# Altium PCB DPT2.2.PcbDoc (part 2 of 2)
Units mil, origin at the board's own origin, x right, y up, seen from the top; angles counter-clockwise.
Board outline 3640 x 3840 mil, 4 copper layers (Top Layer, Layer 1, Layer 2, Bottom Layer), stack 58.706 mil thick; 234 components, 56 nets, 481 pads, 759 vias.
Unrouted connection lines stored in the file: 137.
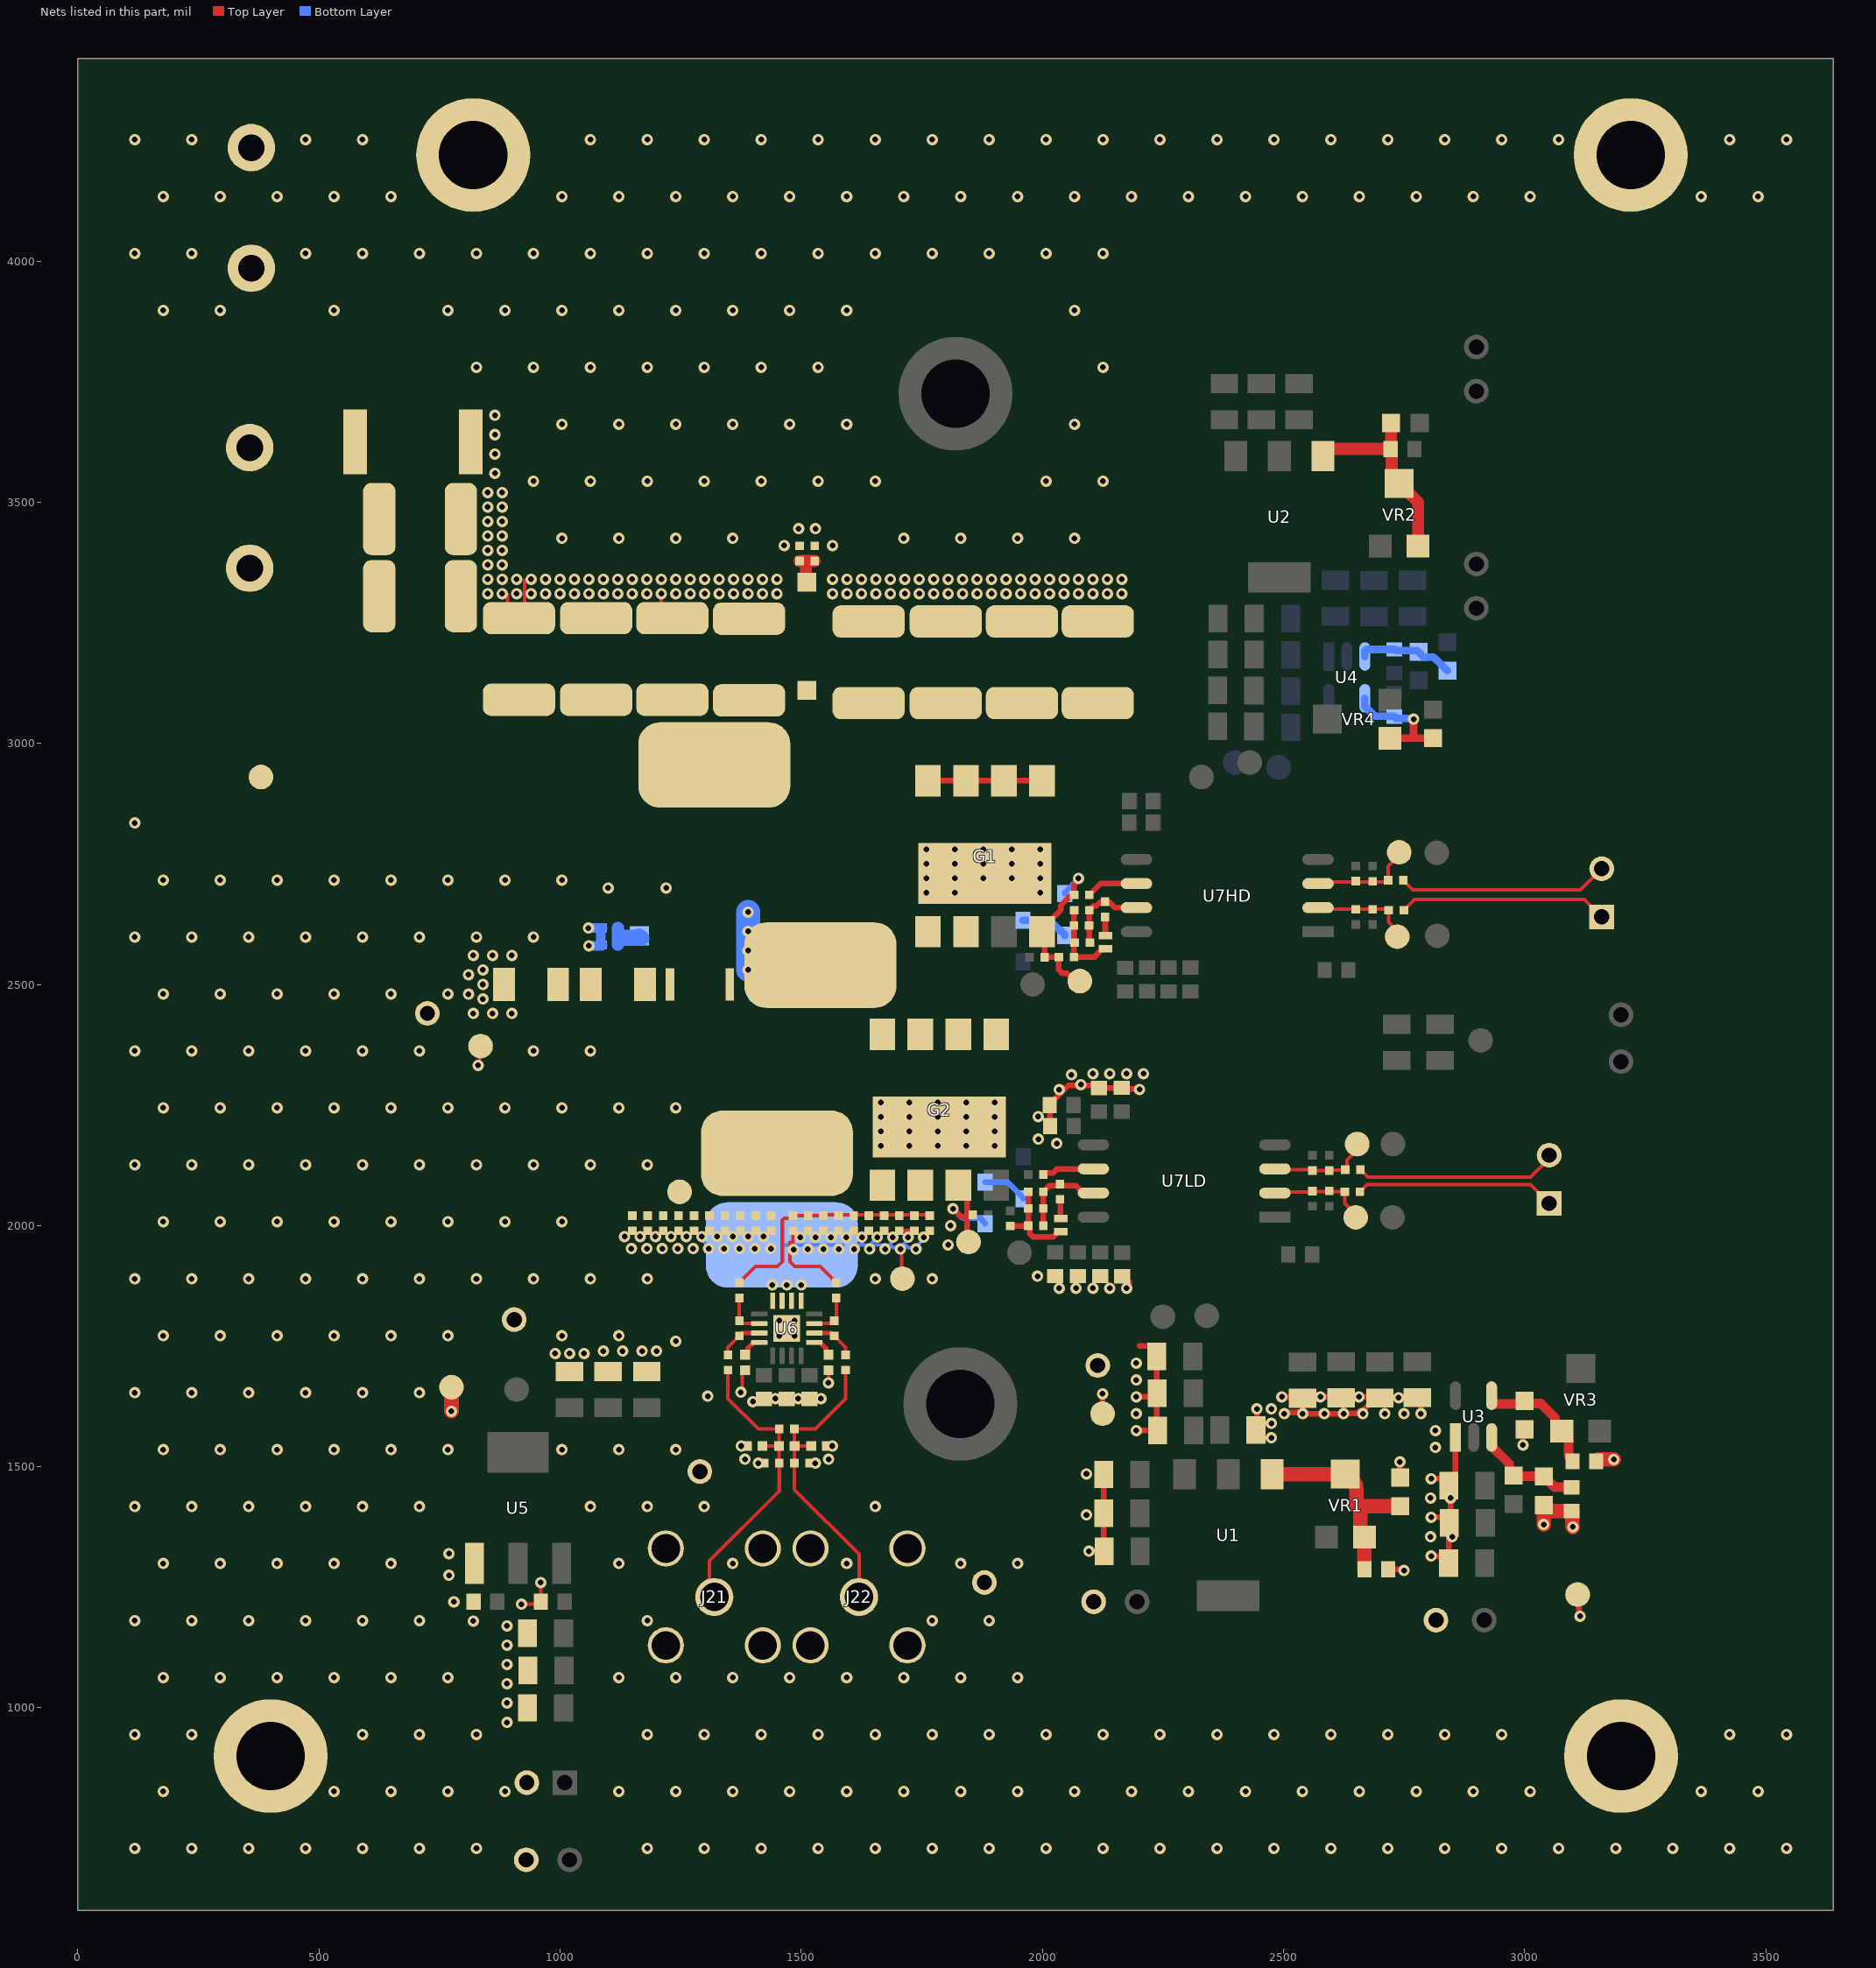
[diagram p4: the nets of this part, all layers, seen from the top]

## Via types
v1: diameter 23.62, hole 11.81, Top Layer to Bottom Layer, tented both sides, 744 vias
v2: diameter 23.62, hole 11.81, Top Layer to Bottom Layer, 15 vias

## Nets (pads, with @x,y where several pads share a name; then routed paths per layer and width w, separated by ;. In a path a pad name is that pad's centre, name@x,y a point inside that pad or via, vN(x,y) a via of type N, cw(c..) or ccw(c..) an arc to the next point about the centre after c; other vN are vias at no path point) (continued)
L_SS: C11.2 C12.2 C13.2 C14.2 C19.1 C21.2 C22.2 C23.2 C24.2 C31.2 C32.2 C33.2 C34.2 C35.1 C36.1 C44.2 C53.1 C63LD.1 C64LD.1 C65LD.1 C66LD.1 C68LD.2 C69LD.2 C70LD.2 C71LD.2 D3LD.1 G2.3 L_SS1.1 L_SS2.1 L_SS3.1 L_SS4.1 L_SS.1 R11.2 R19.1 RSET1.1 RSET3.1 U3.1 | length 2345.6
  Top Layer w11.81: v1(1815,2035) 1833,2017 1843.82,2017 ; G2.3@1825.98,2083.5 1825.98,2077.6 1843.82,2059.76 1843.82,2017 ; L_SS3.1@1847,1966 1843.82,1969.18 1843.82,2017 ; R19.1@1848.53,2022.37 R19.1@1855.99,2022.37 ; C71LD.2@2016.04,2206.22 2015.72,2206.54 2015.72,2251.64 2015.39,2251.97 2040.27,2276.84 2053.94,2290.51 2080.07,2290.51 2112.14,2290.51 C70LD.2@2117.21,2285.45 ; v1(2096.61,1325) C44.2@2128.3,1324.98 2127.61,1325.67 C12.2@2127.61,1484 ; C70LD.2@2117.21,2290.51 2122.21,2285.51 2159.81,2285.51 2162.34,2288.04 C69LD.2@2164.81,2290.51 ; L_SS1.1@2125,1610 v1(2125,1651.3) ; C69LD.2@2164.81,2285.57 2166.52,2283.87 2200.05,2283.87 v1(2201.76,2282.17) ; C65LD.1@2167.55,1894.77 2180.59,1881.73 2180.59,1870.59 v1@2180,1870 ; 2201.61,1750 2224.97,1750 2237.35,1737.62 C13.2@2237.35,1652 ; v1@2206.61,1575 C14.2@2239.21,1575 2237.35,1576.86 C13.2@2237.35,1651.14 ; v1@2206.61,1645 2231.21,1645 C13.2@2237.35,1651.14 ; C13.2@2238.21,1652 C13.2@2237.35,1651.14 ; v1(2445,1620) 2445,1588.21 2446.79,1590 v1(2475,1590) ; v1(2496.61,1645) v1(2576.61,1645) v1(2656.61,1645) C23.2@2700.45,1645 ; v1(2501.61,1610) 2503.87,1612.26 2530.24,1612.26 v1@2531.61,1613.64 ; C34.2@2539.61,1642 2540,1641.61 v1(2540,1610) v1(2625,1610) ; C33.2@2619.61,1643 2625,1637.61 v1(2625,1610) ; v1@2659.28,1615.72 2654.53,1610.97 2625.97,1610.97 v1(2625,1610) ; v1(2665,1610) 2667.26,1612.26 2667.26,1618.7 C23.2@2691.16,1642.6 ; C23.2@2700.02,1642.6 2700.45,1643.04 v1(2738.93,1643.04) C24.2@2777.4,1643.04 2785,1635.44 v1(2785,1610) ; C19.1@2717.21,1287.48 2747.52,1287.48 v1(2750,1285) ; v1(2741.61,1510) 2741.61,1477.93 RSET1.1@2742.02,1477.53 ; v1(2806.61,1315) C21.2@2842.19,1315 ; v1(2806.61,1395) 2832.66,1395 C53.1@2844.08,1383.58 ; v1(2806.61,1475) 2837.59,1475 2843.02,1469.57 C22.2@2843.02,1461 ; C21.2@2842.58,1300.39 2842.58,1315 v1@2842.58,1355 ; C22.2@2843.02,1475 2848.16,1475 2856.79,1483.64 2856.79,1498.64 2856.94,1498.79 U3.1@2856.94,1560.76 ; v1(2846.61,1435) 2846.61,1386.11 C53.1@2844.08,1383.58 ; v1(2850,1355) v1@2842.58,1355 ; v1(2996.61,1545) 2996.61,1574.07 RSET3.1@3000.02,1577.47 ; L_SS2.1@3110,1235 3112.74,1232.26 3112.74,1192.26 v1(3115,1190) ; C36.1@3148.61,1511.25 C36.1@3152.35,1515 ; v1@2842.58,1355 2842.58,1382.07 C53.1@2844.08,1383.58
  Top Layer w30: v1(3040,1380) R11.2@3040,1420.47 3052.32,1408.16 C35.1@3097.72,1408.16 3098.86,1407.02 3098.86,1376.14 v1(3100,1375) ; C36.1@3152.35,1515 v1(3185,1515)
  Bottom Layer w11.81: 1832,2017 1834.13,2017 1835.93,2015.2 1871.77,2015.2 1881.61,2005.35 D3LD.1@1881.61,2003.39
  other v1: 2805,1355 2091.61,1400 2805,1435 2091.61,1485 2815,1540 2475,1560 2195,1575 2815,1575 2195,1610 2585,1610 2710,1610 2750,1610 2475,1620 2195,1645 2195,1680 2195,1715 2035,1870 2070,1870 2105,1870 2140,1870 2175,1870 1990,1895 1805,1960 1810,2000 2080.07,2292.36 2105,2315 2140,2315 2175,2315 2210,2315
  other v2: 2030,2170 1991.88,2179.44 1991.51,2225.79 2035.07,2282.04 2060.48,2312.74
NetC19_2: C19.2 RSET1.2 U1.1 VR1.2 VR1.3 | length 452.7
  Top Layer w30: U1.1@2476.18,1484.55 2628.47,1484.55 2650.7,1462.32 2650.7,1454 2651.61,1453.09 2651.61,1418.47 RSET1.2@2742.02,1418.47 ; 2660,1418.47 2660,1362.47 2668,1354.47 C19.2@2668,1287.48
NetC20_2: C20.2 RSET2.2 U2.1 VR2.2 VR2.3 | length 427.3
  Top Layer w25: U2.1@2582.15,3595.68 2582.15,3599.42 2593.27,3610.54 2721.85,3610.54 C20.2@2722.39,3610 ; RSET2.2@2723.47,3664 2722.93,3663.46 2722.93,3610.54 2724.66,3608.82 2724.66,3554.4 2779.37,3499.68 VR2.2@2779.37,3409.13
NetC35_2: C35.2 R8.2 R11.1 U3.3 | length 228.7
  Top Layer w19.68: U3.3@2931.75,1560.76 2931.75,1542.46 2968.16,1506.05 2968.16,1490.39 R8.2@2977.02,1481.53 2978.01,1480.53 3039,1480.53 R11.1@3040,1479.53 3062.16,1457.37 C35.2@3097.72,1457.37
NetC36_2: C36.2 RSET3.2 U3.4 VR3.1 | length 265.5
  Top Layer w19.68: U3.4@2931.75,1647.41 2931.75,1631.8 2933.13,1630.43 2993.91,1630.43 RSET3.2@3000.02,1636.53 ; RSET3.2@3003.18,1633.36 3005.79,1630.75 3034.03,1630.75 3063.46,1601.32 3063.46,1587.91 VR3.1@3077.24,1574.13 3091.02,1560.35 3091.02,1521.59 3099.39,1513.22 C36.2@3099.39,1511.25
NetC37_2: C37.2 R9.2 R12.1 U4.3 | length 202.2
  Bottom Layer w15.75: U4.3@2668.88,3179.92 2668.88,3191.41 2672.07,3194.61 C37.2@2730,3194.61 2732.54,3192.07 2777.46,3192.07 R12.1@2780,3189.53 2790.83,3178.7 2811.15,3178.7 2814.78,3175.08 2815.39,3175.08 R9.2@2840,3150.47
NetC38_2: C38.2 RSET4.2 U4.4 VR4.1 | length 257.2
  Top Layer w15.75: VR4.1@2720.87,3010.63 2721.18,3010.94 2770,3010.94 ; v1(2770,3050) 2770,3010.94 ; RSET4.2@2810,3010.47 2809.53,3010.94 2770,3010.94
  Bottom Layer w15.75: U4.4@2668.88,3093.27 2668.88,3076.85 2689.65,3056.08 2729.32,3056.08 2733.89,3051.51 2768.49,3051.51 v1(2770,3050)
NetC39_2: C39.2 R15.2
NetC58_2: C58.2 U6.9 | length 44.3
  Top Layer w9.84: U6.9@1527.43,1757.54 1539.24,1757.54 1551.65,1745.13 1551.65,1737.65 C58.2@1556.96,1732.34
NetC59_2: C59.2 C60.1 J21.1 R33.2 R35.1 R36.2 | length 638.8
  Top Layer w7.28: J21.1@1320,1230 1310,1240 1310,1305 1454.65,1449.65 R33.2@1454.6,1507.54 ; R35.1@1348.3,1700.45 1348.3,1641.39 1411.49,1578.21 R36.2@1454.4,1578.21 ; C59.2@1419.56,1542.97 C60.1@1454.21,1542.97 ; R33.2@1454.6,1507.54 R33.2@1454.6,1507.54 ; R36.2@1454.6,1578.4 R36.2@1454.4,1578.21 ; C60.1@1454.21,1542.97 1454.4,1543.17 R36.2@1454.4,1578.21 ; C60.1@1454.21,1542.97 1454.4,1542.77 1454.4,1507.73 R33.2@1454.6,1507.54
NetC60_2: C60.2 C61.1 J22.1 R36.1 R38.1 R39.2 | length 630.3
  Top Layer w7.28: C61.1@1521.13,1542.97 C60.2@1486.49,1542.97 ; R38.1@1592.39,1700.45 1592.39,1641.39 1529.4,1578.4 R36.1@1486.1,1578.4 1486.29,1578.21 1486.29,1543.17 C60.2@1486.49,1542.97 ; J22.1@1620,1230 1620,1318.48 1486.1,1452.38 R39.2@1486.1,1507.54 1486.29,1507.73 1486.29,1542.77 C60.2@1486.49,1542.97
NetC62_2: C62.2 U6.4 | length 44.3
  Top Layer w9.84: C62.2@1383.73,1732.34 1389.05,1737.65 1389.05,1745.13 1401.45,1757.54 U6.4@1413.26,1757.54
NetD1HD_1: D1HD.1 R44HD.2 | length 38.6
  Top Layer w11.81: R44HD.2@2130.4,2639.96 2130.66,2639.71 2130.66,2601.8 D1HD.1@2130.91,2601.54
NetD1HD_2: D1HD.2 FB1HD.1 R45HD.2 R46HD.2 R47HD.2 | length 171.9
  Top Layer w11.81: FB1HD.1@2065.81,2556.8 2109.45,2556.8 2109.45,2559.41 2111.38,2559.41 2111.38,2560.77 2124.66,2574.04 D1HD.2@2130.91,2574.04 ; FB1HD.1@2065.81,2556.8 R47HD.2@2065.84,2589.97 ; R47HD.2@2065.87,2590 2065.91,2590.05 2065.91,2622.14 2065.91,2654.01 R45HD.2@2065.96,2654.05
NetD1LD_1: D1LD.1 R44LD.2 | length 40.3
  Top Layer w11.81: R44LD.2@2036.65,2054.6 2037.47,2053.78 2037.47,2015.82 D1LD.1@2038.29,2015
NetD1LD_2: D1LD.2 FB1LD.1 R45LD.2 R46LD.2 R47LD.2 | length 197
  Top Layer w11.81: FB1LD.1@1933.61,1999.25 1933.77,1999.41 1970.68,1999.41 R46LD.2@1970.83,1999.56 1973.79,1996.61 1973.79,1983.77 1980.7,1976.85 2023.28,1976.85 2030.19,1983.77 2030.19,1985.66 2032.04,1987.5 D1LD.2@2038.29,1987.5 ; R47LD.2@1970.87,2035 R45LD.2@1970.87,2070 ; R46LD.2@1971.17,1999.9 R47LD.2@1971.17,2034.69
NetD2HD_1: D2HD.1 FB1HD.2 G1.4 H_Gate1.1 R7.2 R48HD.2 | length 353.8
  Top Layer w11.81: v1(2075,2720) 2075,2716.8 2066.12,2707.93 R48HD.2@2066.12,2685.54 2063.17,2682.59 2057.29,2682.59 2038.6,2663.9 2038.6,2654.54 1999.25,2615.18 G1.4@1999.25,2609.28 2004.97,2603.55 R7.2@2004.97,2556.22 2005.27,2556.51 2034.02,2556.51 FB1HD.2@2034.31,2556.8 2034.31,2530.23 2041.78,2522.76 2051.33,2522.76 2067.21,2506.88 H_Gate1.1@2077.86,2506.88
  Bottom Layer w11.81: D2HD.1@2046.61,2688.31 2046.61,2690.28 2075,2718.66 v1(2075,2720)
NetD2HD_2: D2HD.2 D3HD.2 | length 100.9
  Bottom Layer w15.75: D3HD.2@1960,2633.31 2015,2633.31 2036.77,2611.54 2038.74,2611.54 2046.61,2603.66 D2HD.2@2046.61,2601.69
NetD2LD_2: D2LD.2 D3LD.2 | length 94.4
  Bottom Layer w11.81: D3LD.2@1881.61,2090 1928.27,2090 1960.61,2057.66 D2LD.2@1960.61,2055.69
NetHSig1_1: HSig1.1 R2.2 R3.1 R4.2 U7HD.2 | length 211
  Top Layer w7.28: U7HD.2@2571.74,2659.18 2574.33,2656.59 2715.66,2656.59 R4.2@2718.25,2654 2718.25,2628.63 2736,2610.88 HSig1.1@2736,2599
NetJ4_1: J4.1 R4.1 | length 434.3
  Top Layer w7.28: R4.1@2749.75,2654 2771.75,2676 3124,2676 J4.1@3160,2640
NetJ4_2: J4.2 R5.1 | length 438
  Top Layer w7.28: R5.1@2748.5,2716 2768.5,2696 3116,2696 J4.2@3160,2740
NetJ10_1: J10.1 R16.1 | length 414.6
  Top Layer w7.28: R16.1@2658.75,2070 2673.75,2085 3012,2085 J10.1@3051,2046
NetJ10_2: J10.2 R17.1 | length 420.9
  Top Layer w7.28: R17.1@2659.75,2116 2675.59,2100.16 3012.16,2100.16 3051,2139 J10.2@3051,2146
NetLSig1_1: LSig1.1 R13.2 R14.1 R16.2 U7LD.2 | length 209.5
  Top Layer w7.28: U7LD.2@2482.44,2067.56 2484.4,2069.53 2558.03,2069.53 R13.2@2560,2071.5 2560.75,2070.75 2626.5,2070.75 R16.2@2627.25,2070 2627.25,2045.89 2650,2023.15 LSig1.1@2650,2017
NetnHSig1_1: nHSig1.1 R5.2 R6.1 R10.2 U7HD.3 | length 215.6
  Top Layer w7.28: U7HD.3@2571.74,2709.18 2574.73,2712.17 2713.17,2712.17 R5.2@2717,2716 2717,2745.36 2740,2768.36 nHSig1.1@2740,2774
NetnLSig1_1: nLSig1.1 R17.2 R18.1 R21.2 U7LD.3 | length 211.2
  Top Layer w7.28: U7LD.3@2482.44,2117.56 2484.09,2115.91 2558.35,2115.91 R21.2@2560,2114.25 R18.1@2595,2114.25 2595.87,2115.13 2627.38,2115.13 R17.2@2628.25,2116 2631.66,2119.41 2631.66,2135.78 2653,2157.12 nLSig1.1@2653,2169
NetR15_1: R15.1 R20.2
NetR32_1: R32.1 R35.2 U6.3 | length 92.9
  Top Layer w7.28: R35.2@1348.3,1731.95 1348.3,1747.69 R32.1@1371.92,1771.32
  Top Layer w9.84: R32.1@1371.92,1771.32 1377.83,1777.22 U6.3@1413.26,1777.22
NetR32_2: R32.2 R34.1 U6.2 | length 91
  Top Layer w7.28: R34.1@1371.92,1850.06 R32.2@1371.92,1802.81 1377.83,1796.91 U6.2@1413.26,1796.91
NetR37_1: R37.1 R40.2 U6.11 | length 92.7
  Top Layer w7.28: U6.11@1527.43,1796.91 1562.87,1796.91 R40.2@1568.77,1802.81 1572.71,1806.75 R37.1@1572.71,1850.06
NetR38_2: R38.2 R40.1 U6.10 | length 92.9
  Top Layer w7.28: R40.1@1568.77,1771.32 1592.39,1747.69 R38.2@1592.39,1731.95
  Top Layer w9.84: U6.10@1527.43,1777.22 1562.87,1777.22 R40.1@1568.77,1771.32
NetR41D_2: R41D.2 R42D.2 R43D.2 | length 119.6
  Bottom Layer w25: R43D.2@1119.61,2582 1119.9,2582.29 1119.9,2600.7 ; R42D.2@1120.19,2616.95 1120.19,2600.7 R41D.2@1164.48,2600.7
  Bottom Layer w31.5: 1135,2595.94 R41D.2@1169.7,2595.94 ; R41D.2@1164.48,2600.7 R41D.2@1168.42,2596.76
NetR41V_2: R41V.2 R42V.2 R43V.2 | length 75.4
  Top Layer w25: R42V.2@1496.76,3378 1510,3378 ; R41V.2@1510,3334.12 1510,3378 ; R43V.2@1528.26,3378 1510,3378
NetR44HD_1: R44HD.1 R45HD.1 R46HD.1 R47HD.1 U7HD.7 | length 173
  Top Layer w11.81: R47HD.1@2097.36,2590 2097.41,2590.05 2097.41,2654.01 R45HD.1@2097.45,2654.05 2106.3,2662.9 2112.19,2662.9 2119.28,2670 2140,2670 2150.82,2659.18 U7HD.7@2195.31,2659.18
NetR44LD_1: R44LD.1 R45LD.1 R46LD.1 R47LD.1 U7LD.7 | length 188.5
  Top Layer w11.81: R46LD.1@2002.33,1999.56 2002.35,2034.98 R45LD.1@2002.36,2070 2015.51,2083.15 2033.7,2083.15 R44LD.1@2036.65,2086.1 2039.54,2083.21 2069.24,2083.21 2084.89,2067.56 U7LD.7@2106.01,2067.56
NetR48HD_1: R48HD.1 U7HD.6 | length 107.5
  Top Layer w11.81: R48HD.1@2097.62,2685.54 2121.26,2709.18 U7HD.6@2195.31,2709.18
NetR48LD_1: R48LD.1 U7LD.6 | length 108.7
  Top Layer w11.81: R48LD.1@2002.17,2105.76 2005.12,2108.72 2022.07,2108.72 2030.91,2117.56 U7LD.6@2106.01,2117.56
PGND: C1.2 C2.2 C3.2 C4.2 C5.1 C6.2 C7.2 C8.1 C46.2 C47.2 C48.2 C49.1 C50.1 C51.1 C52.1 C55.1 C56.1 C57.1 C58.1 C59.1 C61.2 C62.1 C72.2 C73.2 C74.2 C75.2 J3.1 J3.2 J20.1 J21.2 J21.3 J21.4 J21.5 J22.2 J22.3 J22.4 J22.5 MH1.1 MH2.1 MH3.1 MH4.1 PGND1.1 PGND2.1 PGND3.1 PGND4.1 PGND5.1 PGND6.1 PGND7.1 PGND.1 R1.2 R20.1 R22.1 R23.1 R24.1 R25.1 R26.1 R27.1 R28.1 R29.1 R30.1 R31.1 R33.1 R37.2 R39.1 R42D.1 R42V.1 R43D.1 R43V.1 R49.1 R50.1 R51.1 R52.1 R53.1 R54.1 R55.1 R56.1 R57.1 R58.1 U5.1 U6.13 U6.14 U6.15 U6.16 U6.17 U6.18 U6.19 U6.20 U6.21 | length 1346.9
  Top Layer w7.28: v1(830.36,2332.02) 832.86,2334.52 832.86,2369.52 PGND2.1@835.36,2372.02 ; v1@891.61,3308 891.61,3283.03 C72.2@915,3259.65 926.61,3271.26 926.61,3338 ; v1(920,1215) 955.39,1215 C50.1@960.39,1220 960,1220.39 v1(960,1260) ; v1@1210,3315 1210,3282.65 C6.2@1233,3259.65 ; v1(1375,1654.57) 1378.13,1657.69 1378.13,1694.45 C62.1@1383.73,1700.06 ; 1476.76,1965 1476.76,1925.42 1487.18,1915 1539.26,1915 R37.2@1572.71,1881.55 ; R22.1@1483.03,1989.25 1483.68,1988.6 1483.68,1955.77 1478.11,1950.2 v1(1484.33,1950.2) ; v1(1556.69,1674.15) 1556.83,1674.29 1556.83,1699.92 C58.1@1556.96,1700.06 ; v1(1706.12,1951.35) 1708.06,1949.41 1708.06,1891.94 PGND1.1@1710,1890 ; R30.1@1707.79,1988.89 1708.72,1989.82 R23.1@1730.75,1989.82
  Top Layer w30: v1(775,1615) PGND3.1@775,1665
  Bottom Layer w7.28: v1(1308.18,1952.35) 1308.18,1956.77 v1@1297.13,1967.82 ; J20.1@1460,1960 J20.1@1514.08,1960 ; v1(1514.08,1951.35) J20.1@1514.08,1960 ; v1(1546.08,1951.35) J20.1@1546.08,1960 ; v1(1610.1,1951.35) 1610.1,1960 1626,1960 ; v1(1626,1976) 1626,1960 ; v1(1642.11,1951.35) 1642.11,1960 1626,1960 ; v1(1658,1976) 1658,1975.85 1642.15,1960 v1@1674.12,1960 ; v1(1690,1976) 1686.87,1972.87 1686.87,1962.46 1684.42,1960 ; v1@1703,1954.47 1689.94,1954.47 1684.42,1960 ; v1(1706.12,1951.35) 1706.12,1955.74 v1@1710.39,1960 ; v1(1754,1976) 1754,1971.61 1738.13,1955.74 v1(1738.13,1951.35) 1735.01,1954.47 1721.95,1954.47 1716.42,1960 v1@1710.39,1960 ; v1@1297.13,1967.82 1297.13,1973.87 v1(1294,1977) 1294,1970.95 v1@1297.13,1967.82 ; J20.1@1514.08,1960 1530,1960 J20.1@1546.08,1960 ; J20.1@1546.08,1960 J20.1@1578.09,1960 ; J20.1@1578.09,1960 v1(1578.09,1951.35) 1586.75,1960 J20.1@1578.09,1960 ; v1(1674.12,1951.35) v1@1674.12,1960 ; v1(1674.12,1951.35) v1@1674.12,1960 ; v1(1674.12,1951.35) v1@1674.12,1960 ; v1@1674.12,1960 1684.42,1960 ; v1@1710.39,1960 v1@1722,1971.61 ; v1@1722,1971.61 v1(1722,1976) ; v1@1722,1971.61 v1(1722,1976) ; v1@1722,1971.61 v1(1722,1976)
  Bottom Layer w20: v1(1058.86,2617) R42D.1@1088.67,2616.97 ; v1(1060,2580) R43D.1@1080,2580 ; R43D.1@1088.12,2582 1086.12,2580 R43D.1@1080,2580 ; R42D.1@1088.69,2616.95 1084.27,2612.52 1084.27,2584.27 R43D.1@1080,2580
  other v1: 118.11,708.66 236.22,708.66 354.33,708.66 472.44,708.66 590.55,708.66 708.66,708.66 826.77,708.66 1181.1,708.66 1299.21,708.66 1417.32,708.66 1535.43,708.66 1653.54,708.66 1771.65,708.66 1889.76,708.66 2007.87,708.66 2125.98,708.66 2244.09,708.66 2362.2,708.66 2480.31,708.66 2598.42,708.66 2716.53,708.66 2834.64,708.66 2952.76,708.66 3070.87,708.66 3188.98,708.66 3307.09,708.66 3425.2,708.66 3543.31,708.66 177.17,826.77 531.5,826.77 649.61,826.77 767.72,826.77 885.83,826.77 1122.05,826.77 1240.16,826.77 1358.27,826.77 1476.38,826.77 1594.49,826.77 1712.6,826.77 1830.71,826.77 1948.82,826.77 2066.93,826.77 2185.04,826.77 2303.15,826.77 2421.26,826.77 2539.37,826.77 2657.48,826.77 2775.59,826.77 2893.7,826.77 3011.81,826.77 3366.14,826.77 3484.25,826.77 118.11,944.88 236.22,944.88 590.55,944.88 708.66,944.88 826.77,944.88 1181.1,944.88 1299.21,944.88 1417.32,944.88 1535.43,944.88 1653.54,944.88 1771.65,944.88 1889.76,944.88 2007.87,944.88 2125.98,944.88 2244.09,944.88 2362.2,944.88 2480.31,944.88 2598.42,944.88 2716.53,944.88 2834.64,944.88 2952.76,944.88 3425.2,944.88 3543.31,944.88 890,970 890,1010 890,1050 177.17,1062.99 295.28,1062.99 413.39,1062.99 531.5,1062.99 649.61,1062.99 767.72,1062.99 1122.05,1062.99 1240.16,1062.99 1358.27,1062.99 1476.38,1062.99 1594.49,1062.99 1712.6,1062.99 1830.71,1062.99 1948.82,1062.99 890,1090 890,1130 890,1170 820,1180 118.11,1181.1 236.22,1181.1 354.33,1181.1 472.44,1181.1 590.55,1181.1 708.66,1181.1 1181.1,1181.1 1771.65,1181.1 1889.76,1181.1 780,1220 770,1275 177.17,1299.21 295.28,1299.21 413.39,1299.21 531.5,1299.21 649.61,1299.21 1122.05,1299.21 1358.27,1299.21 1594.49,1299.21 1830.71,1299.21 1948.82,1299.21 770,1320 118.11,1417.32 236.22,1417.32 354.33,1417.32 472.44,1417.32 590.55,1417.32 708.66,1417.32 1062.99,1417.32 1181.1,1417.32 1299.21,1417.32 1653.54,1417.32 1411.29,1507.54 1529.4,1507.54 1383.73,1515.41 1556.96,1515.41 177.17,1535.43 295.28,1535.43 413.39,1535.43 531.5,1535.43 649.61,1535.43 767.72,1535.43 1003.94,1535.43 1122.05,1535.43 1240.16,1535.43 1375.86,1542.97 1564.84,1542.97 1400,1635 1446.73,1641.39 1493.97,1641.39 1541.21,1641.39 1306.43,1646.32 118.11,1653.54 236.22,1653.54 354.33,1653.54 472.44,1653.54 590.55,1653.54 708.66,1653.54 990,1735 1020,1735 1050,1735 1240,1760 177.17,1771.65 295.28,1771.65 413.39,1771.65 531.5,1771.65 649.61,1771.65 767.72,1771.65 1003.94,1771.65 1122.05,1771.65 1440.35,1877.06 1470.35,1877.06 1500.35,1877.06 118.11,1889.76 236.22,1889.76 354.33,1889.76 472.44,1889.76 590.55,1889.76 708.66,1889.76 826.77,1889.76 944.88,1889.76 1062.99,1889.76 1181.1,1889.76 1653.54,1889.76 1771.65,1889.76 1148.14,1952.35 1180.15,1952.35 1212.16,1952.35 1244.16,1952.35 1276.17,1952.35 1340.19,1952.35 1372.19,1952.35 1404.2,1952.35 1437.3,1952.29 1498,1976 1530,1976 1562,1976 1594,1976 1134,1977 1166,1977 1198,1977 1230,1977 1262,1977 1326,1977 1358,1977 1390,1977 1422,1977 177.17,2007.87 295.28,2007.87 413.39,2007.87 531.5,2007.87 649.61,2007.87 767.72,2007.87 885.83,2007.87 1003.94,2007.87 118.11,2125.98 236.22,2125.98 354.33,2125.98 472.44,2125.98 590.55,2125.98 708.66,2125.98 826.77,2125.98 944.88,2125.98 1062.99,2125.98 1181.1,2125.98 177.17,2244.09 295.28,2244.09 413.39,2244.09 531.5,2244.09 649.61,2244.09 767.72,2244.09 885.83,2244.09 1003.94,2244.09 1122.05,2244.09 1240.16,2244.09 118.11,2362.2 236.22,2362.2 354.33,2362.2 472.44,2362.2 590.55,2362.2 708.66,2362.2 944.88,2362.2 1062.99,2362.2 820,2440 860,2440 900,2440 840,2470 177.17,2480.31 295.28,2480.31 413.39,2480.31 531.5,2480.31 649.61,2480.31 767.72,2480.31 810,2480 840,2500 810,2520 840,2530 820,2560 860,2560 900,2560 118.11,2598.42 236.22,2598.42 354.33,2598.42 472.44,2598.42 590.55,2598.42 708.66,2598.42 826.77,2598.42 944.88,2598.42 1100,2700 1220,2700 177.17,2716.53 295.28,2716.53 413.39,2716.53 531.5,2716.53 649.61,2716.53 767.72,2716.53 885.83,2716.53 1003.94,2716.53 118.11,2834.64 850,3310 880,3310 910,3310 940,3310 970,3310 1000,3310 1030,3310 1060,3310 1090,3310 1120,3310 1150,3310 1180,3310 1210,3310 1240,3310 1270,3310 1300,3310 1330,3310 1360,3310 1390,3310 1420,3310 1450,3310 1565,3310 1595,3310 1625,3310 1655,3310 1685,3310 1715,3310 1745,3310 1775,3310 1805,3310 1835,3310 1865,3310 1895,3310 1925,3310 1955,3310 1985,3310 2015,3310 2045,3310 2075,3310 2105,3310 2135,3310 2165,3310 850,3340 880,3340 910,3340 940,3340 970,3340 1000,3340 1030,3340 1060,3340 1090,3340 1120,3340 1150,3340 1180,3340 1210,3340 1240,3340 1270,3340 1300,3340 1330,3340 1360,3340 1390,3340 1420,3340 1450,3340 1565,3340 1595,3340 1625,3340 1655,3340 1685,3340 1715,3340 1745,3340 1775,3340 1805,3340 1835,3340 1865,3340 1895,3340 1925,3340 1955,3340 1985,3340 2015,3340 2045,3340 2075,3340 2105,3340 2135,3340 2165,3340 850,3370 880,3370 850,3400 880,3400 1465,3410 1565,3410 1003.94,3425.2 1122.05,3425.2 1240.16,3425.2 1358.27,3425.2 1712.6,3425.2 1830.71,3425.2 1948.82,3425.2 2066.93,3425.2 850,3430 880,3430 1495,3445 1530,3445 850,3460 880,3460 850,3490 880,3490 850,3520 880,3520 944.88,3543.31 1062.99,3543.31 1181.1,3543.31 1299.21,3543.31 1417.32,3543.31 1535.43,3543.31 1653.54,3543.31 2007.87,3543.31 2125.98,3543.31 865,3560 865,3600 865,3640 1003.94,3661.42 1122.05,3661.42 1240.16,3661.42 1358.27,3661.42 1476.38,3661.42 1594.49,3661.42 2066.93,3661.42 865,3680 826.77,3779.53 944.88,3779.53 1062.99,3779.53 1181.1,3779.53 1299.21,3779.53 1417.32,3779.53 1535.43,3779.53 2125.98,3779.53 177.17,3897.64 295.28,3897.64 531.5,3897.64 767.72,3897.64 885.83,3897.64 1003.94,3897.64 1122.05,3897.64 1240.16,3897.64 1358.27,3897.64 1476.38,3897.64 1594.49,3897.64 2066.93,3897.64 118.11,4015.75 236.22,4015.75 472.44,4015.75 590.55,4015.75 708.66,4015.75 826.77,4015.75 944.88,4015.75 1062.99,4015.75 1181.1,4015.75 1299.21,4015.75 1417.32,4015.75 1535.43,4015.75 1653.54,4015.75 1771.65,4015.75 1889.76,4015.75 2007.87,4015.75 2125.98,4015.75 177.17,4133.86 295.28,4133.86 413.39,4133.86 531.5,4133.86 649.61,4133.86 1003.94,4133.86 1122.05,4133.86 1240.16,4133.86 1358.27,4133.86 1476.38,4133.86 1594.49,4133.86 1712.6,4133.86 1830.71,4133.86 1948.82,4133.86 2066.93,4133.86 2185.04,4133.86 2303.15,4133.86 2421.26,4133.86 2539.37,4133.86 2657.48,4133.86 2775.59,4133.86 2893.7,4133.86 3011.81,4133.86 3366.14,4133.86 3484.25,4133.86 118.11,4251.97 236.22,4251.97 472.44,4251.97 590.55,4251.97 1062.99,4251.97 1181.1,4251.97 1299.21,4251.97 1417.32,4251.97 1535.43,4251.97 1653.54,4251.97 1771.65,4251.97 1889.76,4251.97 2007.87,4251.97 2125.98,4251.97 2244.09,4251.97 2362.2,4251.97 2480.31,4251.97 2598.42,4251.97 2716.53,4251.97 2834.64,4251.97 2952.76,4251.97 3070.87,4251.97 3425.2,4251.97 3543.31,4251.97
  other v2: 1090,1740 1130,1740 1170,1740 1200,1740
Source: G2.1 G2.2 G2.9 J14.1 R22.2 R23.2 R24.2 R25.2 R26.2 R27.2 R28.2 R29.2 R30.2 R31.2 R34.2 R49.2 R50.2 R51.2 R52.2 R53.2 R54.2 R55.2 R56.2 R57.2 R58.2 Source1.1 | length 510.4
  Top Layer w7.28: R34.2@1371.92,1881.55 1405.37,1915 1451,1915 1461,1925 1461,2011.27 1465.27,2015.53 1477.82,2015.53 R22.2@1483.03,2020.75 R24.2@1514.53,2020.75 R25.2@1546.02,2020.75 ; R25.2@1546.02,2022.25 1577.52,2022.25 1609.02,2022.25 1640.51,2022.25 1672.01,2022.25 1703.5,2022.25 1735,2022.25 R31.2@1768.46,2022.25
  Top Layer w9.84: R31.2@1766.5,2020.75 1770.43,2016.81 R31.2@1770.43,2016.67
  other v1: 1665,2165 1724.06,2165 1783.11,2165 1842.17,2165 1901.22,2165 1665,2195 1724.06,2195 1783.11,2195 1842.17,2195 1901.22,2195 1665,2225 1724.06,2225 1783.11,2225 1842.17,2225 1901.22,2225 1665,2255 1724.06,2255 1783.11,2255 1842.17,2255 1901.22,2255
SW_NODE: C39.1 G1.1 G1.2 G1.9 G2.5 G2.6 G2.7 G2.8 J6.1 R41D.1 | length 120
  Bottom Layer w50: v2(1390,2530) v2(1390,2610) v1(1390,2650)
  other v1: 1390,2570 1760,2690 1819.06,2690 1996.22,2690 1760,2720 1819.06,2720 1878.11,2720 1937.17,2720 1996.22,2720 1760,2750 1819.06,2750 1878.11,2750 1937.17,2750 1996.22,2750 1760,2780 1819.06,2780 1878.11,2780 1937.17,2780 1996.22,2780
VBUS: C1.1 C2.1 C3.1 C4.1 C6.1 C7.1 C72.1 C73.1 C74.1 C75.1 G1.5 G1.6 G1.7 G1.8 J1.1 J1.2 J2.1 R1.1 R41V.1 Vdd1.1 | length 236.2
  Top Layer w11.81: G1.8@1763.03,2922.27 G1.7@1841.77,2922.27 G1.6@1920.51,2922.27 G1.5@1999.25,2922.27
pads on no net: MH7.1 MH8.1 U6.1

## Polygon pours and split planes (outlines as drawn)
PGND on Top Layer "Top Layer-PGND" (solid, pour order 262): 756.61,3223 2190,3223 2190,3358 906.61,3358 906.61,3725 756.61,3725 756.61,3358
PGND on Top Layer "PGND_L01_P224" (solid, pour order 224): 995,1670 995,1710 970,1710 965,1715 965,1750 970,1755 1215,1755 1230,1740 1230,1670
+5 on Top Layer "+5_L01_P260" (solid, pour order 260): 960,1650 1220,1650 1230,1640 1230,1580 1220,1570 950,1570
GND_SIG on Top Layer "GND_SIG_L01_P257" (solid, pour order 257): 2520,2800 2520,2280 2510,2270 2470,2270 2440,2240 2440,1970 2500,1910 3250,1910 3310,1970 3310,2770 3250,2830 2550,2830
H_SS on Top Layer "H_SS_L01_P255" (solid, pour order 255): 2000,2500 2140,2500 2160,2480 2160,2445.62 2000,2445.62
+5 on Top Layer "NONET_L-01_P-001" (solid, pour order 58): 1534.32,1674.86 1406.37,1674.86 1406.37,1704.39 1435.7,1733.72 1435.7,1745.63 1504.99,1745.63 1504.99,1733.72 1534.32,1704.39
PGND on Top Layer "NONET_L-01_P-001" (solid, pour order 64): 1776.34,1956.34 1765,1945 1473.19,1945 1473.19,1999.09 1776.34,1999.09
PGND on Top Layer "NONET_L-01_P-001" (solid, pour order 66): 1541.21,1625.65 1399.48,1625.65 1391.61,1633.52 1391.61,1649.27 1397.51,1655.17 1543.18,1655.17 1549.09,1649.27 1549.09,1633.52
PGND on Top Layer "NONET_L-01_P-001" (solid, pour order 118): 1549.09,1554.78 1545.15,1550.84 1545.15,1531.16 1533.34,1519.35 1521.53,1519.35 1517.59,1515.41 1517.59,1499.66 1521.53,1495.73 1556.96,1495.72 1576.65,1515.41 1576.65,1550.84 1572.71,1554.78
PGND on Top Layer "NONET_L-01_P-001" (solid, pour order 119): 1391.61,1554.78 1395.54,1550.84 1395.54,1531.16 1407.36,1519.35 1419.17,1519.35 1423.1,1515.41 1423.1,1499.66 1419.17,1495.73 1383.73,1495.72 1364.05,1515.41 1364.05,1550.84 1367.99,1554.78
PGND on Top Layer "PGND_L01_P129" (solid, pour order 129): 1419.41,1901.06 1419.41,1841.06 1434.41,1826.06 1509.41,1826.06 1524.41,1841.06 1524.41,1901.06
L_SS on Top Layer "L_SS_L01_P131" (solid, pour order 131): 2048,2322.09 2043.75,2322.09 1980.54,2258.89 1980.54,2171.05 1985.02,2166.57 2039.75,2166.57 2039.75,2250.85 2061.24,2272.39 2230,2272.39 2230,2315.97 2223.57,2322.39 2048,2322.39
L_-V on Top Layer "L_-V_L01_P132" (solid, pour order 132): 2048,2252.39 2248,2252.39 2248,2152.39 2078,2152.39 2048,2182.39
PGND on Top Layer "PGND_L01_P136" (solid, pour order 136): 920,2580 920,2420 800,2420 790,2430 790,2570 800,2580
NetC39_2 on Top Layer "NETC39_2_L01_P137" (solid, pour order 137): 1240,2540 1240,2460 1150,2460 1150,2540
NetR15_1 on Top Layer "NETR15_1_L01_P138" (solid, pour order 138): 970,2540 1090,2540 1090,2460 970,2460
L_-V on Top Layer "L_-V_L01_P151" (solid, pour order 151): 2836.61,1695 2836.61,1615 2841.61,1610 2896.61,1610 2901.61,1615 2901.61,1695
L_-VIN on Top Layer "L_-VIN_L01_P152" (solid, pour order 152): 2881.61,1590 2906.61,1590 2906.61,1530 2921.61,1515 2941.61,1515 2941.61,1455 2951.61,1445 3006.61,1445 3006.61,1390 2966.61,1350 2966.61,1145 2876.61,1145 2876.61,1585
L_SS on Top Layer "L_SS_L01_P154" (solid, pour order 154): 2076.61,1525 2076.61,1290 2151.61,1290 2151.61,1525
H_SS on Top Layer "H_SS_L01_P168" (solid, pour order 168): 2122.49,2505.58 2122.49,2470.58 2147.49,2445.58 2322.49,2445.58 2332.49,2455.58 2332.49,2505.58
GND_SIG on Top Layer "GND_SIG_L01_P171" (solid, pour order 171): 2855,2400 2855,2475 2700,2475 2700,2400
+5_SIG on Top Layer "+5_SIG_L01_P172" (solid, pour order 172): 2705,2365 2855,2365 2855,2285 2705,2285
GND_SIG on Top Layer "GND_SIG_L01_P173" (solid, pour order 173): 2446.61,2220 2446.61,2155 2556.61,2155 2556.61,2190 2526.61,2220
GND_SIG on Top Layer "GND_SIG_L01_P175" (solid, pour order 175): 2536.61,2805 2536.61,2740 2616.61,2740 2616.61,2805
L_SS on Top Layer "L_SS_L01_P179" (solid, pour order 179): 2811.61,1665 2811.61,1590 2486.61,1590 2486.61,1665 2491.61,1665 2486.61,1665 2491.61,1665
L_SS on Top Layer "L_SS_L01_P180" (solid, pour order 180): 2791.61,1500 2791.61,1260 2866.61,1260 2866.61,1500
VBUS on Top Layer "VBUS_L01_P188" (solid, pour order 188): 2020,2948.7 2195,3047.6 2195,3128 2040,3128 747,3128 665,3210 665,3730 98,3730 98,3020 288,2830 1487,2830 1545,2888 2020,2888
SW_NODE on Top Layer "SW_NODE_L01_P190" (solid, pour order 190): 1879,2646 1879,2541 1950,2470 1950,2390 1930,2370 1660,2370 1580,2450 1370,2450 1370,2655 1380,2665 1685,2665 1720,2700 1720,2790 2020,2790 2020,2670 1890,2670 1880,2660
SW_NODE on Top Layer "SW_NODE_L01_P191" (solid, pour order 191): 1370,2550 1360,2540 1340,2540 1340,2460 1380,2460 1390,2470 1390,2550
Source on Top Layer "SOURCE_L01_P194" (solid, pour order 194): 1275,2190 1120,2035 1120,2010 1465,2010 1780,2010 1785,2015 1785,2130 1795,2140 1925,2140 1925,2275 1635,2275 1605,2245 1295,2245 1275,2225
+5 on Top Layer "+5_L01_P198" (solid, pour order 198): 980,1390 935,1345 935,1255 890,1255 890,1345 840,1395 840,1660 870,1690 950,1690 980,1660
H_+V on Top Layer "H_+V_L01_P201" (solid, pour order 201): 2460,3630 2525,3630 2525,3530 2600,3455 2725,3455 2725,3385 2560,3385 2560,3310 2390,3310 2390,3000 2385,2995 2340,2995 2335,3000 2335,3450 2375,3450 2460,3535
H_+V on Top Layer "H_+V_L01_P206" (solid, pour order 206): 2380,3070 2380,2900 2350,2870 2350,2520 2150,2520 2150,2620 2230,2620 2290,2680 2290,2950 2340,3000 2340,3070
H_-V on Top Layer "H_-V_L01_P212" (solid, pour order 212): 2750,3060 2665,2975 2560,2975 2560,3130 2750,3130
H_SS on Top Layer "H_SS_L01_P213" (solid, pour order 213): 2760,3050 2760,3130 2840,3130 2880,3090 2880,3050
H_SS on Top Layer "H_SS_L01_P215" (solid, pour order 215): 2570,3810 2570,3720 2320,3720 2320,3780 2350,3810
H_+VIN on Top Layer "H_+VIN_L01_P216" (solid, pour order 216): 2430,3560 2430,3630 2450,3650 2570,3650 2570,3700 2560,3690 2340,3690 2340,3650 2360,3630 2360,3560
H_SS on Top Layer "H_SS_L01_P218" (solid, pour order 218): 2200,2790 2190,2780 2157.45,2780 2157.45,2887.45 2170,2900 2200,2900
H_-V on Top Layer "H_-V_L01_P219" (solid, pour order 219): 2210,2920 2210,2780 2200,2770 2150,2770 2150,2740 2270,2740 2280,2750 2280,2920
H_+VIN on Top Layer "H_+VIN_L01_P222" (solid, pour order 222): 2940,3690 2940,3770 2640,3770 2560,3690 2560,3650 2650,3650 2690,3690 2700,3690
PGND on Top Layer "PGND_L01_P223" (solid, pour order 223): 1120,1960 1135,1945 1455,1945 1455,2000 1120,2000
H_SS on Top Layer "H_SS_L01_P227" (solid, pour order 227): 2415,3290 2465,3290 2465,2955 2440,2930 2395,2930 2395,2980 2415,3000
H_SS on Top Layer "H_SS_L01_P229" (solid, pour order 229): 1890,2655 1890,2540 1985,2445 2010,2445 2010,2655
L_+VIN on Top Layer "L_+VIN_L01_P231" (solid, pour order 231): 2325,1450 2255,1450 2235,1430 2235,1180 2155,1180 2155,1260 2175,1280 2175,1525 2325,1525
L_SS on Top Layer "L_SS_L01_P232" (solid, pour order 232): 2180,1915 2190,1905 2190,1860 2185,1855 2000,1855 1980,1875 1980,1915 2010,1915
PGND on Top Layer "PGND_L01_P233" (solid, pour order 233): 755,1360 755,1205 800,1160 840,1160 840,1360
+VIN on Top Layer "+VIN_L01_P234" (solid, pour order 234): 1045,1360 1070,1335 1070,640 1060,630 980,630 970,640 970,1360
PGND on Top Layer "PGND_L01_P236" (solid, pour order 236): 945,1275 975,1275 975,1200 955,1180 955,955 940,940 885,940 870,955 870,1200
L_SS on Top Layer "L_SS_L01_P237" (solid, pour order 237): 2195,1760 2180,1745 2180,1560 2200,1540 2265,1540 2265,1760
L_SS on Top Layer "L_SS_L01_P238" (solid, pour order 238): 2425,1635 2425,1550 2495,1550 2545,1600 2545,1635 2525,1635 2495,1665 2470,1665
L_SS on Top Layer "L_SS_L01_P239" (solid, pour order 239): 2870,1590 2870,1495 2795,1495 2790,1500 2790,1590
PGND on Top Layer "PGND_L01_P240" (solid, pour order 240): 1580,3400 1580,3440 1560,3460 1470,3460 1450,3440 1450,3400
+5_SIG on Top Layer "+5_SIG_L01_P241" (solid, pour order 241): 2530,2625 2530,2525 2570,2485 2610,2485 2610,2625
GND_SIG on Top Layer "GND_SIG_L01_P242" (solid, pour order 242): 2620,2635 2620,2510 2665,2510 2665,2635
+5_SIG on Top Layer "+5_SIG_L01_P244" (solid, pour order 244): 2450,2030 2450,1965 2495,1920 2525,1920 2525,2030
L_-V on Top Layer "L_-V_L01_P249" (solid, pour order 249): 2080,2160 2240,2160 2280,2120 2280,1960 2480,1760 3190,1760 3220,1730 3220,1550 3130,1550 3130,1600 3050,1680 2450,1680 2320,1810 2320,1850 2170,2000 2170,2130 2150,2150 2080,2150
L_SS on Top Layer "L_SS_L01_P250" (solid, pour order 250): 1860,2000 1940,1920 2020,1920 2020,1820 2000,1820 1989.76,1820 1840,1920 1791.41,1950.78 1791.41,2120 1860,2120
L_+V on Top Layer "L_+V_L01_P251" (solid, pour order 251): 2075,2030 2060,2015 2060,1975 2015,1975 2005,1965 2005,1930 2180,1930 2200,1910 2200,1790 2220,1770 2275,1770 2280,1765 2280,1540 2325,1540 2340,1525 2340,1305 2275,1240 2275,1145 2630,1145 2630,1390 2575,1445 2420,1445 2420,1515 2400,1535 2400,1595 2405,1600 2405,1710 2265,1850 2265,1905 2140,2030
GND_SIG on Layer 1 "GND_SIG_L02_P259" (solid, pour order 259): 2520,2800 2520,2280 2510,2270 2470,2270 2440,2240 2440,1970 2500,1910 3250,1910 3310,1970 3310,2770 3250,2830 2550,2830
H_SS on Layer 1 "H_SS_L02_P256" (solid, pour order 256): 1890,2659.68 1890,2539.68 1984.68,2445 2325.32,2445 2350,2469.68 2350,2769.68 2540,2959.68 2840,2959.68 3010,3129.68 3010,3819.68 2950,3879.68 2390,3879.68 2310,3799.68 2310,3069.68 2190,2949.68 2130,2889.68 2130,2749.68 2020,2749.68 2020,2659.68
L_SS on Layer 1 "L_SS_L02_P184" (solid, pour order 184): 1790,2120 1880,2120 1980,2220 1980,2260 2050,2330 2260,2330 2290,2300 2290,1960 2480,1770 3190,1770 3230,1730 3230,1140 3200,1110 2080,1110 2030,1160 2030,1840 2030,1790 1870,1900 1790,1950 1790,2110
PGND on Layer 1 "PGND_L02_P246" (solid, pour order 246): 2050,2900 2195,3045 2195,3995 2300,4100 3620,4100 3620,4400 20,4400 20,600 3620,600 3620,1020 2060,1020 1976.38,1103.62 1976.38,1765.69 1785,1895 1785,2130 1930,2130 1950,2150 1950,2470 1880,2540 1880,2660 1885,2665 2020,2665 2020,2870
H_SS on Bottom Layer "H_SS_L04_P228" (solid, pour order 228): 2200,2897.64 2200,2780 2140,2780 2140,2872.28 2165.35,2897.64
GND_SIG on Bottom Layer "GND_SIG_L04_P248" (solid, pour order 248): 2520,2800 2520,2280 2510,2270 2470,2270 2440,2240 2440,1970 2500,1910 3250,1910 3310,1970 3310,2770 3250,2830 2550,2830
PGND on Bottom Layer "PGND_L04_P254" (solid, pour order 254): 2020,2950 2195,3045 2195,3995 2300,4100 3620,4100 3620,4400 20,4400 20,600 3620,600 3620,1020 2060,1020 1976.38,1103.62 1976.38,1765.69 1785,1895 1785,2130 1930,2130 1950,2150 1950,2470 1880,2540 1880,2660 1885,2665 2020,2665 2020,2870
SW_NODE on Bottom Layer "SW_NODE_L04_P195" (solid, pour order 195): 1730,2800 1730,2710 1730,2660 2020,2660 2020,2800
Source on Bottom Layer "SOURCE_L04_P196" (solid, pour order 196): 1930,2130 1930,2280 1610,2280 1610,2130
H_SS on Bottom Layer "H_SS_L04_P203" (solid, pour order 203): 2570,3310 2570,3370 2830,3370 2830,3310
H_-V on Bottom Layer "H_-V_L04_P205" (solid, pour order 205): 2500,3295 2500,3005 2500.08,3005.08 2551.2,3005.08 2551.2,3053.8 2550,3055 2560,3065 2640,3065 2640,3135 2560,3135 2550,3145 2550,3295
H_-V on Bottom Layer "H_-V_L04_P211" (solid, pour order 211): 2500,2970 2680,2970 2680,3030 2640,3070 2500,3070
H_-VIN on Bottom Layer "H_-VIN_L04_P214" (solid, pour order 214): 2570,3290 2570,3240 2600,3240 2620,3220 2620,3150 2650,3150 2650,3220 2670,3240 2800,3240 2820,3220 2820,3190 2860,3190 2860,3290
H_-V on Bottom Layer "H_-V_L04_P217" (solid, pour order 217): 2550,3000 2360,2810 2310,2810 2250,2750 2150,2750 2150,2790 2170,2810 2210,2810 2210,2920 2410,2920 2490,3000 2490,3070 2550,3070
H_-VIN on Bottom Layer "H_-VIN_L04_P220" (solid, pour order 220): 2840,3290 2860,3310 2860,3320 2940,3320 2940,3190 2840,3190
H_SS on Bottom Layer "H_SS_L04_P226" (solid, pour order 226): 2415,3290 2465,3290 2465,3000 2435,2970 2410,2970 2400,2980 2415,2995 2415,3005
H_SS on Bottom Layer "H_SS_L04_P230" (solid, pour order 230): 1890,2605 1965,2605 1965,2570 1990,2570 1990,2515 1915,2515 1890,2540
H_SS on Bottom Layer "H_SS_L04_P245" (solid, pour order 245): 2560,3225 2560,3140 2605,3140 2610,3145 2610,3210 2595,3225 2585,3225
L_SS on Bottom Layer "L_SS_L04_P252" (solid, pour order 252): 1865,2020 1895,2020 1895,1985 1860,1985 1815,1940 1808.64,1940 1795,1953.64 1795,2050 1865,2050
L_SS on Layer 2 "L_SS_L03_P261" (solid, pour order 261): 1790,2120 1910,2120 1960,2170 2010,2170 2010,2130 1980,2100 1980,2040 1960,2040 1870,1950 1790,1950
H_SS on Layer 2 "H_SS_L03_P208" (solid, pour order 208): 1890,2659.68 1890,2539.68 1984.68,2445 2325.32,2445 2350,2469.68 2350,2769.68 2540,2959.68 2840,2959.68 3010,3129.68 3010,3819.68 2950,3879.68 2390,3879.68 2310,3799.68 2310,3069.68 2190,2949.68 2130,2889.68 2130,2749.68 2020,2749.68 2020,2659.68
PGND on Layer 2 "PGND_L03_P253" (solid, pour order 253): 2050,2900 2195,3045 2195,3995 2300,4100 3620,4100 3620,4400 20,4400 20,600 3620,600 3620,1020 2060,1020 1976.38,1103.62 1976.38,1765.69 1785,1895 1785,2130 1930,2130 1950,2150 1950,2470 1880,2540 1880,2660 1885,2665 2020,2665 2020,2870
+5_SIG on Layer 2 "+5_SIG_L03_P186" (solid, pour order 186): 2520,2800 2520,2280 2510,2270 2470,2270 2440,2240 2440,1970 2500,1910 3250,1910 3310,1970 3310,2770 3250,2830 2550,2830

## Other copper
Top Layer:
  pour cut-out: 1110,2625.12 1190,2625.12 1190,2570 1110,2570
Layer 1:
  pour cut-out: 1693,1630 ccw(c1830,1630) 1830,1493 ccw(c1830,1630) 1967,1630 ccw(c1830,1630) 1830,1767 ccw(c1830,1630)
  pour cut-out: 1820,3588 cw(c1820,3725) 1683,3725 cw(c1820,3725) 1820,3862 cw(c1820,3725) 1957,3725 cw(c1820,3725)
  pour cut-out: 1820,3588 cw(c1820,3725) 1683,3725 cw(c1820,3725) 1820,3862 cw(c1820,3725) 1957,3725 cw(c1820,3725)
  pour cut-out: 1543.31,3390 1543.31,3310 1483.39,3310 1483.39,3390
  pour cut-out: 1913.39,2791.34 1925.2,2803.15 1948.82,2803.15 1960.63,2791.34 1960.63,2708.66 1948.82,2696.85 1925.2,2696.85 1913.39,2708.66
  pour cut-out: 1854.33,2791.34 1866.14,2803.15 1889.76,2803.15 1901.57,2791.34 1901.57,2708.66 1889.76,2696.85 1866.14,2696.85 1854.33,2708.66
  pour cut-out: 2007.87,2803.15 2019.69,2791.34 2019.69,2677.17 2007.87,2665.35 1984.25,2665.35 1972.44,2677.17 1972.44,2791.34 1984.25,2803.15
  pour cut-out: 1830.71,2803.15 1842.52,2791.34 1842.52,2677.17 1830.71,2665.35 1807.09,2665.35 1795.28,2677.17 1795.28,2791.34 1807.09,2803.15
  pour cut-out: 1771.65,2803.15 1783.46,2791.34 1783.46,2677.17 1771.65,2665.35 1748.03,2665.35 1736.22,2677.17 1736.22,2791.34 1748.03,2803.15
  pour cut-out: 1405.51,2673.23 1413.39,2665.35 1413.39,2515.75 1405.51,2507.87 1374.02,2507.87 1366.14,2515.75 1366.14,2665.35 1374.02,2673.23
  pour cut-out: 318.9,3431.1 287.4,3399.61 287.4,3324.8 318.9,3293.31 393.7,3293.31 425.2,3324.8 425.2,3399.61 393.7,3431.1
  pour cut-out: 318.9,3681.1 287.4,3649.61 287.4,3574.8 318.9,3543.31 393.7,3543.31 425.2,3574.8 425.2,3649.61 393.7,3681.1
  pour cut-out: 1109.6,2625.69 1190,2625.69 1190,2570.57 1109.6,2570.57
  pour cut-out: 1384.36,1870.88 1549.71,1870.88 1549.71,1709.46 1384.36,1709.46
Layer 2:
  pour cut-out: 1693,1630 ccw(c1830,1630) 1830,1493 ccw(c1830,1630) 1967,1630 ccw(c1830,1630) 1830,1767 ccw(c1830,1630)
  pour cut-out: 1693,1630 ccw(c1830,1630) 1830,1493 ccw(c1830,1630) 1967,1630 ccw(c1830,1630) 1830,1767 ccw(c1830,1630)
  pour cut-out: 1543.31,3390 1543.31,3310 1483.39,3310 1483.39,3390
  pour cut-out: 1913.39,2791.34 1925.2,2803.15 1948.82,2803.15 1960.63,2791.34 1960.63,2708.66 1948.82,2696.85 1925.2,2696.85 1913.39,2708.66
  pour cut-out: 1854.33,2791.34 1866.14,2803.15 1889.76,2803.15 1901.57,2791.34 1901.57,2708.66 1889.76,2696.85 1866.14,2696.85 1854.33,2708.66
  pour cut-out: 1830.71,2803.15 1842.52,2791.34 1842.52,2677.17 1830.71,2665.35 1807.09,2665.35 1795.28,2677.17 1795.28,2791.34 1807.09,2803.15
  pour cut-out: 2007.87,2803.15 2019.69,2791.34 2019.69,2677.17 2007.87,2665.35 1984.25,2665.35 1972.44,2677.17 1972.44,2791.34 1984.25,2803.15
  pour cut-out: 1771.65,2803.15 1783.46,2791.34 1783.46,2677.17 1771.65,2665.35 1748.03,2665.35 1736.22,2677.17 1736.22,2791.34 1748.03,2803.15
  pour cut-out: 1405.51,2673.23 1413.39,2665.35 1413.39,2515.75 1405.51,2507.87 1374.02,2507.87 1366.14,2515.75 1366.14,2665.35 1374.02,2673.23
  pour cut-out: 318.9,3681.1 287.4,3649.61 287.4,3574.8 318.9,3543.31 393.7,3543.31 425.2,3574.8 425.2,3649.61 393.7,3681.1
  pour cut-out: 318.9,3431.1 287.4,3399.61 287.4,3324.8 318.9,3293.31 393.7,3293.31 425.2,3324.8 425.2,3399.61 393.7,3431.1
  pour cut-out: 1110,2625.12 1190,2625.12 1190,2570 1110,2570
  pour cut-out: 1401.84,1814.62 1453.02,1814.62 1453.02,1759.5 1401.84,1759.5
Bottom Layer:
  pour cut-out: 2020,2920 2020,2660 1890,2660 1890,2540 1950,2480 1950,2390 1890,2390 1730,2550 1670,2550 1610,2610 1610,2860 1670,2920
  pour cut-out: 1601.65,1630 ccw(c1830,1630) 1830,1401.65 ccw(c1830,1630) 2058.35,1630 ccw(c1830,1630) 1830,1858.35 ccw(c1830,1630)
  pour cut-out: 1820,3496.65 cw(c1820,3725) 1591.65,3725 cw(c1820,3725) 1820,3953.35 cw(c1820,3725) 2048.35,3725 cw(c1820,3725)
  pour cut-out: 450,3780 530,3700 530,3270 450,3190 260,3190 180,3270 180,3700 260,3780
  pour cut-out: 1230,2690 1230,2470 1320,2380 1450,2380 1540,2470 1540,2690 1450,2780 1331.25,2780
  pour cut-out: 1110,2625.12 1190,2625.12 1190,2570 1110,2570
  region net SW_NODE: 1730,2660 2020,2660 2020,2800 1730,2800
  region net Source: 1610,2130 1930,2130 1930,2280 1610,2280

## Silkscreen, mask and mechanical layers (free items; w line width, h text height)
Top Overlay:
  drawing of 32 lines, arcs and shapes, not listed
  text "ENPH479 - GaN Power 2256 / February 2023 / Half Bridge Rev 1.0 / Adam B., Ben O., Dave N." at 2100,4000 h39.37
  text "G" at 760,3918.17 h236.22
  text "G" at 3160,3918.17 h236.22
  text "V_on Adj" at 2860.06,3511.27 h60
  text "H" at 900,3419.47 h1000
  text "V_off Adj" at 2840.06,2991.27 h60
  text "nHSig" at 3220,2731.27 h60
  text "HSig" at 3220,2631.27 h60
  text "nLSig" at 3120,2131.27 h60
  text "LSig" at 3120,2031.27 h60
  text "A" at 240,1978.18 h393.7
  text "V_off Adj" at 3240.06,1571.27 h60
  text "e" at 520,1562.73 h393.7
  text "V_on Adj" at 2540.06,1211.27 h60
  text "x" at 520,1162.73 h393.7
  text "G" at 350,598.17 h236.22
  text "G" at 3140,598.17 h236.22
Mechanical 15:
  circle w10: c1820,3725 r228.35
  circle w10: c1830,1630 r228.35
Board Shape:
  the board outline again, w47.24

## Text inside footprints (layer, text, board x,y; h text height)
C48: Top Overlay "+" at 1124.49,874.02 h59.06 r180